# Altium PCB Regulator.PcbDoc
Units mm, origin at the board's own origin, x right, y up, seen from the top; angles counter-clockwise.
Board outline 50 x 100 mm, 2 copper layers (Top Layer, Bottom Layer); 16 components, 10 nets, 40 pads, 0 vias.
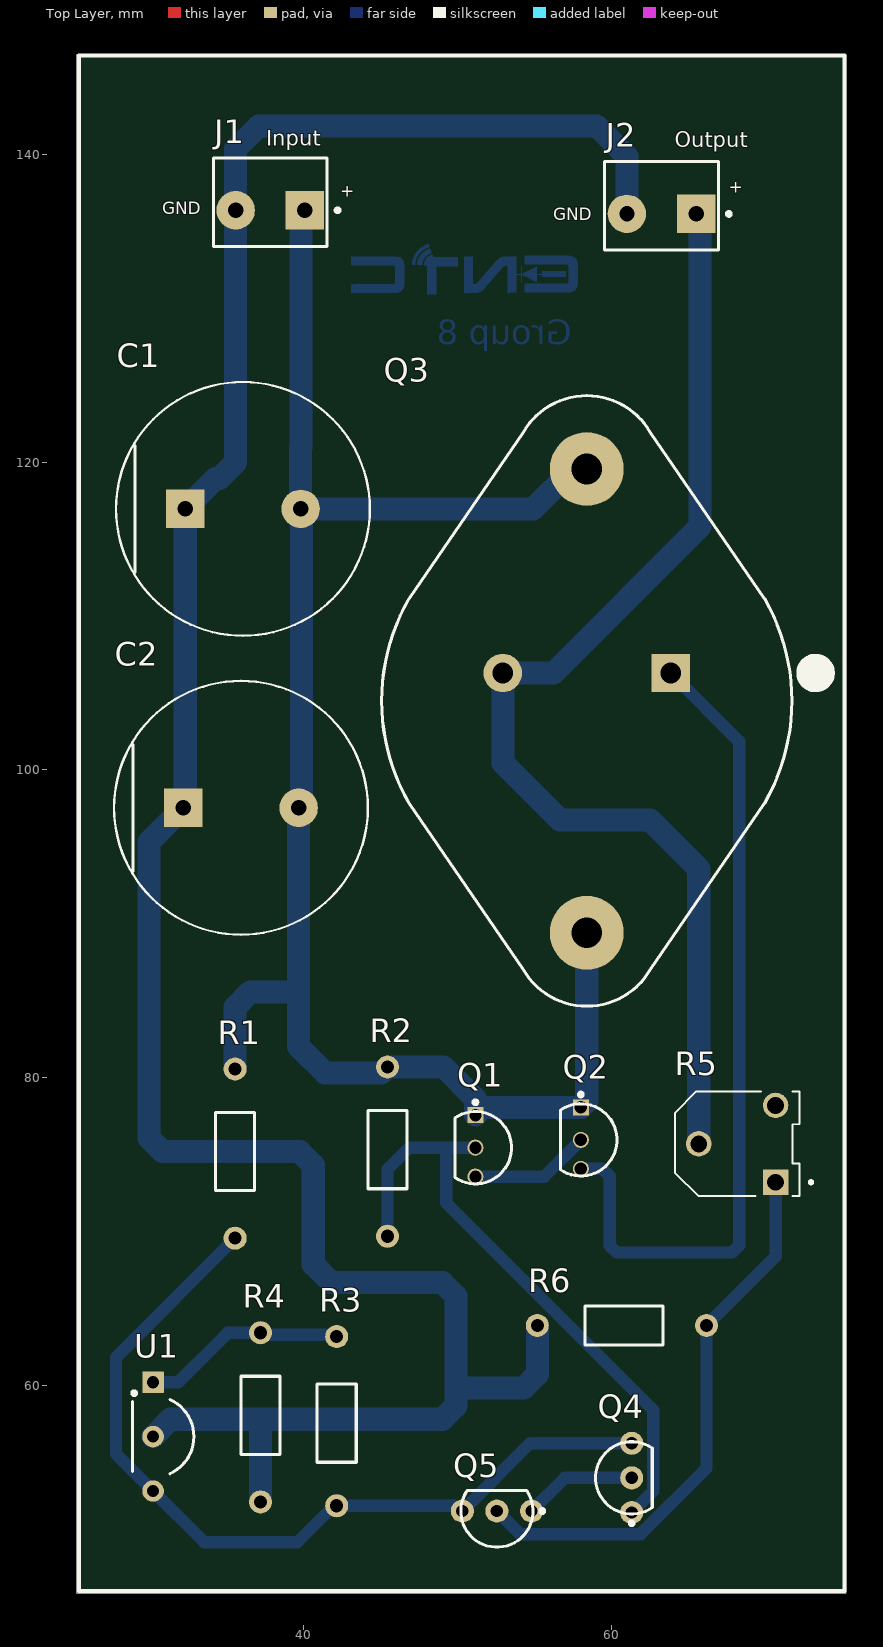
[diagram p0: Top Layer view]
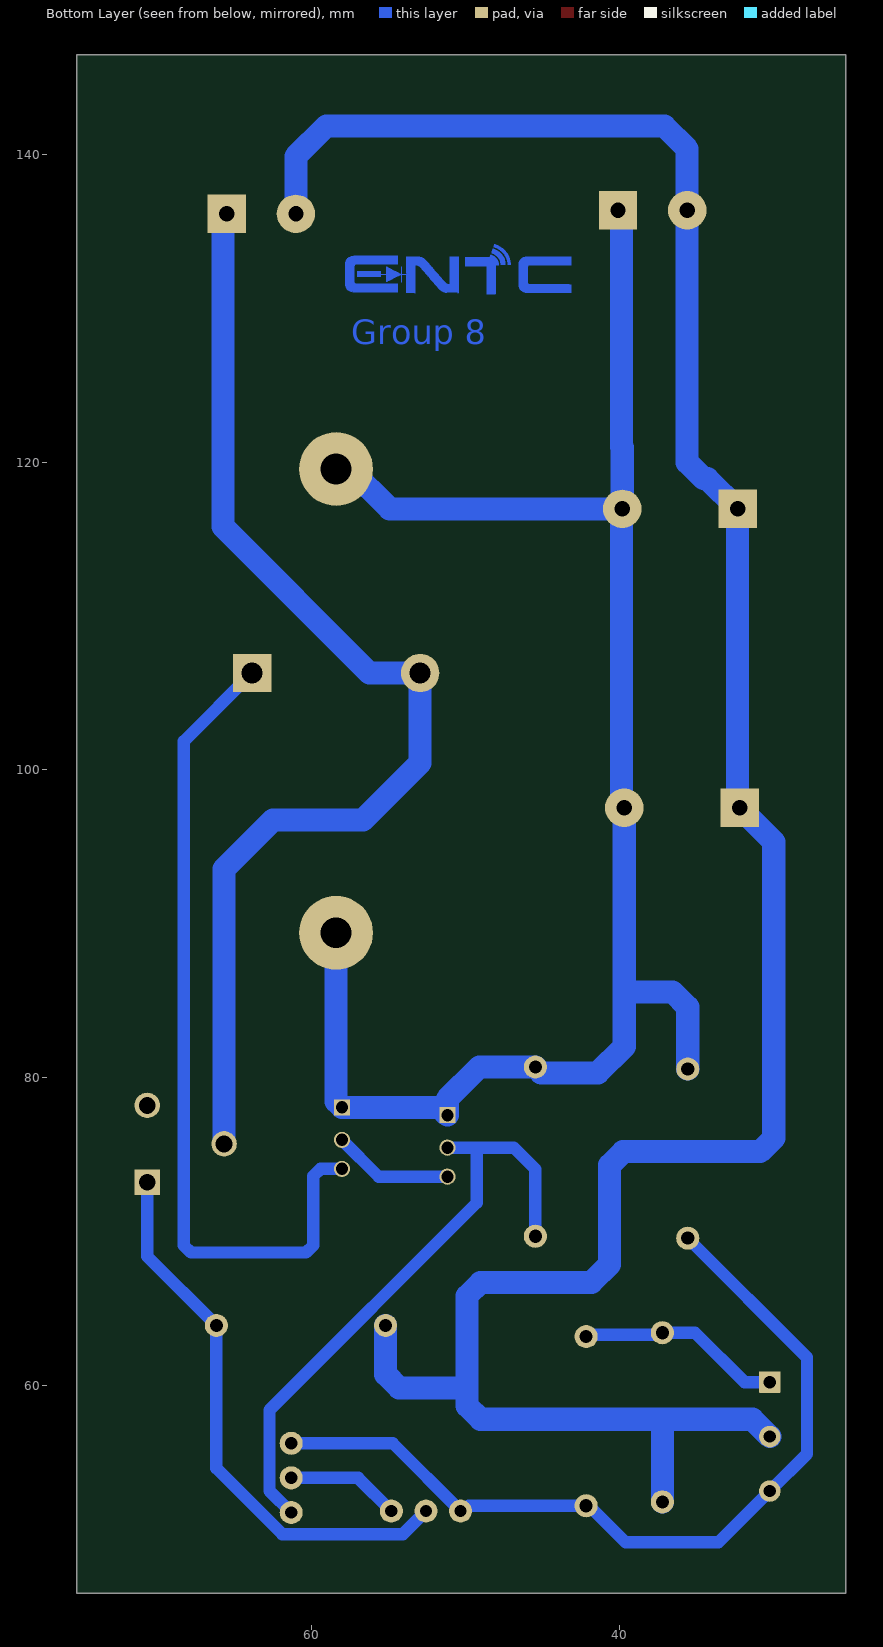
[diagram p1: Bottom Layer view, seen from below]

## Layer stack, top to bottom
Top Solder: solder mask 0.0102, Solder Resist, Dk 3.5
Top Layer: signal copper 0.0356
Dielectric 1: dielectric 0.32, FR-4, Dk 4.8
Bottom Layer: signal copper 0.0356
Bottom Solder: solder mask 0.0102, Solder Resist, Dk 3.5

## Board outline
25.273,46.482 25.273,146.482 75.273,146.482 75.273,46.482

## Design rules (kind name [scope] priority, off if disabled: settings)
Clearance Power_line_clearance [(InNet('GND') OR InNet('Power_line_Reg') OR InNet('Power_line_Un_reg'))] p1: gap=0.3 ignorepadtopadclearanceinfootprint=FALSE except(0: Arc-Hole Track-Hole SMDPad-Hole THPad-Hole Via-Hole Fill-Hole Poly-Hole Region-Hole Text-Hole)
Clearance [All] p2: gap=0.254 ignorepadtopadclearanceinfootprint=FALSE except(0: Arc-Hole Track-Hole SMDPad-Hole THPad-Hole Via-Hole Fill-Hole Poly-Hole Region-Hole Text-Hole)
PolygonConnect [All] p1: connectstyle=Relief reliefconductorwidth=0.254 reliefentries=4 polygonreliefangle="90 Angle" airgapwidth=0.254
RoutingVias [All] p1: holewidth=0.711 width=1.27 viastyle="Through Hole" minholewidth=0.711 minwidth=1.27 maxholewidth=0.711 maxwidth=1.27
SolderMaskExpansion [All] p1: expansion=0.102 istentingtop=FALSE
Width Power_net_widths [(InNet('GND') OR InNet('Power_line_Reg') OR InNet('Power_line_Un_reg'))] p1: maxlimit=3 minlimit=0.254 preferedwidth=1.5
Width [All] p2: maxlimit=1 minlimit=0.254 preferedwidth=0.8
30 further rules are at their usual default settings.

## Components (designator, comment, footprint, x,y, rotation, side; value= is the part's Value field where it differs from the comment)
C1 "10mF" FP-RAD-TH-D_16_0_5-L_25_2-MFG 36.068,116.967 r0 top
C2 "10mF" FP-RAD-TH-D_16_0_5-L_25_2-MFG 35.941,97.536 r0 top
J1 "In" FP-B2B-XH-A_LF_SN-MFG 37.846,136.906 r180 top
J2 "Out" FP-B2B-XH-A_LF_SN-MFG 63.282,136.669 r180 top
Q1 "P2N2222AG" ONSC-TO-92-3-29-11#1 51.181,75.438 r270 top
Q2 "P2N2222AG" ONSC-TO-92-3-29-11#1 58.039,75.946 r270 top
Q3 "2N3773G" ONSC-TO-204-3-1-07 58.421,104.484 r270 top
Q4 "2N5401" ONSC-TO-92-3-29-11#2 61.341,53.975 r90 top
Q5 "P2N2222AG" ONSC-TO-92-3-29-11#2 52.578,51.816 r180 top
R1 "1K" OMTE-WLA-2_V2 35.56,75.184 r90 top
R2 "330 ohm" OMTE-WLA-2_V2 45.466,75.311 r90 top
R3 "2.2K" OMTE-WLA-2_V2 42.164,57.531 r270 top
R4 "1K" OMTE-WLA-2_V2 37.211,58.039 r90 top
R5 "2K" TRIM_3306F-1-104 68.199,75.692 r0 top
R6 "5K" OMTE-WLA-2_V2 60.833,63.881 r0 top
U1 "TL431ILP" LP0003A 30.226,56.658 r0 top

## Footprints (in the part's own frame and the unit in brackets; to place one, negate y for a bottom-side part, rotate by r counter-clockwise, add the part's x,y. Pads: shape width x height; smd on the part's side, far side on the other; paste and mask are expansions set on the pad)
FP-B2B-XH-A_LF_SN-MFG [mm]
  rect 2.5x2.5 hole 1 paste-1000 mask+0: 1(-2.25,0.525)
  round 2.5 hole 1 paste-1000 mask+0: 2(2.25,0.525)
  silkscreen extent -4.5,-2.88 3.7,2.87, body extent -3.8,-2.98 3.8,2.98, height 0.25
FP-RAD-TH-D_16_0_5-L_25_2-MFG [mm]
  rect 2.5x2.5 hole 1 paste-1000 mask+0: 1(-3.75,0)
  round 2.5 hole 1 paste-1000 mask+0: 2(3.75,0)
  silkscreen extent -8.25,-8.25 8.25,8.25, body extent -8.35,-8.35 8.35,8.35, height 0.25
LP0003A [mm] "TO, Flat Index; 3 In-Line, Formed Axial Leads; Body Dia. 4.8mm; Leads 0.56 x 0.41 mm (max)"
  rrect7% 1.4x1.4 hole 0.8: 1(0,3.54)
  round 1.4 hole 0.8: 2(0,0) 3(0,-3.54)
  silkscreen extent -1.35,-2.41 2.65,2.95, body extent -1.33,-2.83 2.35,2.83, height 9.01
OMTE-WLA-2_V2 [mm] "2-Leads, Axial leaded, Body 2.54x5.08mm, Pin Spacing 7.62mm"
  round 1.5 hole 0.85: 1(-5.629,0) 2(5.371,0)
  silkscreen extent -2.54,-1.27 2.54,1.27, body extent -4.11,-1.26 4.11,1.27, height 2.54
ONSC-TO-92-3-29-11#1 [mm] "TO, 3-Leads, Body Dia 4.7mm, Pitch 1.27mm"
  rect 1.05x1.05 hole 0.8: 1(-2.116,0)
  round 1.05 hole 0.8: 2(0,0) 3(1.884,0)
  silkscreen extent -3.07,-1.34 2.35,2.35, body extent -2.35,-1.33 2.36,2.36, height 7.87
ONSC-TO-92-3-29-11#2 [mm] "TO, 3-Leads, Body Dia 4.7mm, Pitch 1.27mm"
  round 1.5 hole 0.8: 1(-2.254,0) 2(0,0) 3(2.246,0)
  silkscreen extent -3.07,-1.34 2.35,2.35, body extent -2.35,-1.33 2.36,2.36, height 7.87
ONSC-TO-204-3-1-07 [mm] "TO-204, Pin Spacing 10.92mm, Lead Dia. 1.09 mm (max)"
  rect 2.5x2.5 hole 1.35: 1(-1.815,5.46)
  round 2.5 hole 1.35: 2(-1.815,-5.46)
  round 4.8 hole 2 mask+0.102: 3(-15.075,0) 4(15.075,0)
  silkscreen extent -19.85,-13.33 19.85,15.5, body extent -19.84,-13.33 19.84,13.33, height 8.51
TRIM_3306F-1-104 [mm]
  rect 1.65x1.65 hole 1.1: 1(2.5,-2.5)
  round 1.65 hole 1.1: 2(-2.5,0) 3(2.5,2.5)
  silkscreen extent -4.05,-3.41 4.9,3.41, body extent -3.2,-1.6 3.2,1.6, height 0.75

## Part data
C1 C2: library part CMP-05427-001523-1, "Aluminum Electrolytic Capacitors (Radial Lead Type) AEC-Q200 Qualified 10000uF ±20% 10V", Case/Package=Radial, Max Operating Temperature=105°C, Min Operating Temperature=-55°C, Package Quantity=100, Ripple Current=1.89A, Tolerance=20%, Voltage=10V, Capacitance=10mF, Construction=RADIAL, Diameter=16mm, Height=25mm, Height - Seated (Max)=1.063inch, Lead Diameter=0.8mm, Lead Pitch=7.5mm, Lead/Base Style=Straight, Length=25mm, Life (Hours)=2000Hour, Mount="Through Hole", Packaging=Bulk, REACH SVHC="No SVHC", Ripple Current (AC)=1.89A, RoHS Compliant=Yes, Series=HD, Termination=Radial, Voltage Rating=10V, Voltage Rating (DC)=10V
J1 J2: library part CMP-2000-05888-3, "CONN HEADER VERT 2POS 2.5MM", Color=Natural, Contact Resistance=20mR, Current Rating=3A, Housing Color=White, Insulation Resistance=1GR, Max Operating Temperature=85°C, Max Voltage Rating (AC)=250V, Min Operating Temperature=-25°C, Connector Type="Male Pin", Contact Material=Brass, Contact Plating=Tin, Contact Type="Male Pin", Depth=5.75mm, Fastening Type=Detent, Housing Material=Polyamide, Lead Free="Lead Free", Lead Pitch=2.5mm, Length=7.4mm, Max Current Rating=3A, Max Voltage Rating (DC)=250V, Mount="Through Hole", Number of Contacts=2, Number of Positions=2, Number of Rows=1, Orientation=Straight, Packaging=Bulk, Pitch=2.5mm, REACH SVHC="No SVHC", Series=XH, Termination=Solder, Voltage Rating=250V, Voltage Rating (AC)=250V, Wire/Cable Gauge=22AWG
Q1 Q2 Q5: library part CMP-1048-01402-1, "Amplifier Transistor, NPN Silicon, 3-Pin TO-92, Pb-Free, Bulk Box", Manufacturer="On Semiconductor", ComponentLink1Description="Manufacturer URL", ComponentLink1URL=http://www.onsemi.com/, ComponentLink2Description=Datasheet, ComponentLink2URL=http://www.onsemi.com/pub_link/Collateral/P2N2222A-D.PDF, ComponentLink3Description="Package Specification", ComponentLink3URL=http://www.onsemi.cn/pub_link/Collateral/2N6426-D.PDF, DatasheetVersion="Rev. 7", fT Min (MHz)=300, IC Continuous (A)=0.6, Mounting Technology="Through Hole", PackageDescription="3-Pin Transistor Outline, Body 4.825 x 3.685 mm, Pitch 1.27 mm", PackageReference=TO-92-3-29-11_AM_SL, PackageVersion="Rev. AM", Packing="Bulk Box", PartNumber=P2N2222AG, Polarity=NPN, RoHS=TRUE
Q3: library part CMP-1048-01054-1, "NPN Power Transistor, 3-Pin TO-204, Pb-Free, Tray", Manufacturer="On Semiconductor", ComponentLink1Description="Manufacturer URL", ComponentLink1URL=http://www.onsemi.com/, ComponentLink2Description=Datasheet, ComponentLink2URL=http://www.onsemi.com/pub_link/Collateral/2N3773-D.PDF, ComponentLink3Description="Package Specification", ComponentLink3URL=http://www.onsemi.com/pub_link/Collateral/1-07.PDF, DatasheetVersion="Rev. 11", IC Continuous (A)=16, Mounting Technology="Through Hole", PackageDescription="2-Pin Transistor Outline, Body 39.37 x 26.67 mm, Pitch 10.92 mm", PackageReference=TO-204-3-1-07, PackageVersion="Rev. Z, 05/1988", Packing=Tray, PartNumber=2N3773G, Polarity=NPN, RoHS=TRUE
Q4: library part CMP-1048-01460-1, "Amplifier Transistor, PNP Silicon, 3-Pin TO-92, Bulk Box", Manufacturer="On Semiconductor", ComponentLink1Description="Manufacturer URL", ComponentLink1URL=http://www.onsemi.com/, ComponentLink2Description=Datasheet, ComponentLink2URL=http://www.onsemi.com/pub_link/Collateral/2N5401-D.PDF, ComponentLink3Description="Package Specification", ComponentLink3URL=http://www.onsemi.cn/pub_link/Collateral/2N6426-D.PDF, DatasheetVersion="Rev. 4", fT Min (MHz)=100, IC Continuous (A)=0.6, Mounting Technology="Through Hole", PackageDescription="3-Pin Transistor Outline, Body 4.825 x 3.685 mm, Pitch 1.27 mm", PackageReference=TO-92-3-29-11_AM_SL, PackageVersion="Rev. AM", Packing="Bulk Box", PartNumber=2N5401, Polarity=PNP, RoHS=FALSE
R1 R2 R3 R4 R6: library part CMP-1237-00001-1, "Miniature Wirewound Current Sense, 0.02 Ohm +/-1%, 0.5 W, 2-Pin THD, RoHS, 25pc Pack", Manufacturer=Ohmite, PartNumber=WLAR020FE, Power Rating="0.5 W", Rated Resistance="0.02 Ohm", Resistance Tolerance=+/-1%, ComponentLink1Description="Manufacturer URL", ComponentLink1URL=http://www.ohmite.com/, ComponentLink2Description=Datasheet, ComponentLink2URL=http://www.ohmite.com/cat/res_wl.pdf, ComponentLink3Description="Package Specification", ComponentLink3URL=http://www.ohmite.com/cat/res_wl.pdf, DatasheetVersion=May-14, Mounting Technology="Through Hole", PackageDescription="2-Pin Axial Lead, Body 5.08 x 2.54 mm, Lead Spread 25 mm", Packing="25pc Pack", RoHS=TRUE
R5: library part 3306F-1-104, "100 kOhms 0.2W, 1/5W PC Pins Through Hole Trimmer Potentiometer Cermet 1 Turn Top Adjustment", Package="6432 Bourns", Availability=Unavailable, Check_prices=https://www.snapeda.com/parts/3306F-1-104/Bourns/view-part/372285/?ref=eda, MF=Bourns, MP=3306F-1-104, Price=None, SnapEDA_Link=https://www.snapeda.com/parts/3306F-1-104/Bourns/view-part/372285/?ref=snap
U1: library part CMP-0366-00043-2, "Adjustable Precision Shunt Regulator, 34 ppm / degC, 100 mA, -40 to 85 degC, 3-pin TO-92 (LP), Pb-Free (RoHS)", Manufacturer="Texas Instruments", Rating=Military, Temp Coeff(Max)(ppm/ degree C)=92, Temp Coeff(Typ)(ppm/ degree C)=34, Code_JEDEC=TO-226, ComponentLink1Description="Manufacturer URL", ComponentLink1URL=http://www.ti.com/, ComponentLink2Description=Datasheet, ComponentLink2URL=http://www.ti.com/general/docs/lit/getliterature.tsp?genericPartNumber=TL431&fileType=pdf, ComponentLink3Description="Package Specification", ComponentLink3URL=http://www.ti.com/litv/pdf/msot002a, DatasheetVersion=SLVS543M, Eco-Plan="Pb-Free (RoHS)", Initial Accuracy @ 25/deg C(%)=2, Iout/Iz(Max)(mA)=100, Min Iz for Regulation(uA)=600, Mounting Technology="Through Hole", PackageDescription="Plastic Cylindrical Package, Formed Lead Option (TO-92)", PackageReference=LP0003A, PackageVersion=4040001-2/C, PartNumber=TL431ILP, SubFamily="Shunt Voltage Reference", VO Adj(Max)(V)=36, VO Adj(Min)(V)=2.495

## Nets (pads, with @x,y where several pads share a name; then routed paths per layer and width w, separated by ;. In a path a pad name is that pad's centre, name@x,y a point inside that pad or via, vN(x,y) a via of type N, cw(c..) or ccw(c..) an arc to the next point about the centre after c; other vN are vias at no path point)
GND: C1.1 C2.1 J1.2 J2.2 R4.1 R6.1 U1.2 | length 167.2
  Bottom Layer w1.5: U1.2 31.353,57.785 37.211,57.785 ; R4.1 37.211,57.785 ; R6.1 55.204,60.696 54.325,59.817 49.911,59.817 ; J2.2 61.032,139.882 59.055,141.859 37.084,141.859 35.596,140.371 35.596,119.991 34.535,118.93 34.281,118.93 C1.1 32.318,97.663 29.972,95.317 29.972,76.063 30.851,75.184 39.761,75.184 40.64,74.305 40.64,67.859 41.824,66.675 49.032,66.675 49.911,65.796 49.911,59.817 ; 37.211,57.785 49.032,57.785 49.911,58.664 49.911,59.817
NetQ1_2: Q1.2 Q4.1 R2.1 | length 40.5
  Bottom Layer w0.8: R2.1 45.466,74.041 46.863,75.438 49.276,75.438 ; Q1.2 49.276,75.438 ; Q4.1 62.745,53.125 62.745,58.391 49.276,71.86 49.276,75.438
NetQ1_3: Q1.3 Q2.2 | length 7.8
  Bottom Layer w0.8: Q1.3 55.647,73.554 Q2.2
NetQ2_3: Q2.3 Q3.1 | length 54.4
  Bottom Layer w0.8: Q2.3 59.436,74.062 59.905,73.593 59.905,69.09 60.373,68.621 67.857,68.621 68.326,69.09 68.326,101.854 Q3.1
NetQ4_2: Q4.2 Q5.1 | length 7.4
  Bottom Layer w0.8: Q5.1 56.991,53.975 Q4.2
NetQ5_2: Q5.2 R5.1 R6.2 | length 36.5
  Bottom Layer w0.8: Q5.2 54.077,50.317 61.923,50.317 66.204,54.598 R6.2 70.699,68.376 R5.1
NetR3_1: R3.1 R4.2 U1.1 | length 13.4
  Bottom Layer w0.8: U1.1 31.877,60.198 35.089,63.41 R4.2 37.336,63.285 42.039,63.285 R3.1
Power_line_Reg: J2.1 Q3.2 R5.2 | length 76.5
  Bottom Layer w1.5: J2.1 65.786,135.89 65.786,115.824 56.261,106.299 Q3.2 52.961,100.455 56.67,96.746 62.514,96.746 65.699,93.561 R5.2
Power_line_Un_reg: C1.2 C2.2 J1.1 Q1.1 Q2.1 Q3.3 Q3.4 R1.2 R2.2 | length 115.7
  Bottom Layer w1.5: R1.2 35.56,84.572 36.553,85.565 39.691,85.565 ; J1.1 39.855,136.14 39.855,121 39.818,120.963 C1.2 ; Q3.4 58.421,78.444 Q2.1 51.689,78.062 Q1.1 51.181,78.613 49.239,80.555 49.216,80.555 49.089,80.682 R2.2 45.085,80.301 41.402,80.301 39.691,82.012 39.691,85.565 ; Q3.3 57.528,119.559 54.936,116.967 C1.2 ; 39.691,85.565 C2.2 39.882,97.727 39.882,116.903 C1.2
Ref: Q4.3 Q5.3 R1.1 R3.2 U1.3 | length 56.1
  Bottom Layer w0.8: R1.1 27.813,61.808 27.813,55.531 U1.3 33.56,49.784 39.599,49.784 41.975,52.16 49.799,52.16 50.143,51.816 Q5.3 54.737,56.221 Q4.3
pads on no net: R5.3

## Other copper
Bottom Layer:
  region: 54.74,131.598 54.401,131.598 54.401,131.043 57.178,131.043 57.178,131.058 57.332,131.058 57.332,131.074 57.394,131.074 57.394,131.089 57.456,131.089 57.456,131.104 57.502,131.104 57.502,131.12 57.533,131.12 57.533,131.135 57.564,131.135 57.564,131.151 57.595,131.151 57.595,131.166 57.61,131.166 57.61,131.182 57.641,131.182 57.641,131.197 57.657,131.197 57.657,131.212 57.672,131.212 57.672,131.228 57.687,131.228 57.687,131.243 57.703,131.243 57.703,131.259 57.718,131.259 57.718,131.29 57.734,131.29 57.734,131.305 57.749,131.305 57.749,131.336 57.765,131.336 57.765,131.367 57.78,131.367 57.78,131.413 57.795,131.413 57.795,131.459 57.811,131.459 57.811,131.567 57.826,131.567 57.826,132.91 57.811,132.91 57.811,133.018 57.795,133.018 57.795,133.064 57.78,133.064 57.78,133.11 57.765,133.11 57.765,133.141 57.749,133.141 57.749,133.172 57.734,133.172 57.734,133.187 57.718,133.187 57.718,133.203 57.703,133.203 57.703,133.234 57.687,133.234 57.687,133.249 57.672,133.249 57.672,133.264 57.641,133.264 57.641,133.28 57.626,133.28 57.626,133.295 57.61,133.295 57.61,133.311 57.579,133.311 57.579,133.326 57.564,133.326 57.564,133.342 57.518,133.342 57.518,133.357 57.487,133.357 57.487,133.372 57.44,133.372 57.44,133.388 57.379,133.388 57.379,133.403 57.286,133.403 57.286,133.419 54.416,133.419 54.416,133.403 54.401,133.403 54.401,132.894 54.416,132.894 54.416,132.863 57.178,132.863 57.178,132.848 57.194,132.848 57.194,132.832 57.209,132.832 57.209,132.817 57.224,132.817 57.224,132.786 57.24,132.786 57.24,131.675 57.224,131.675 57.224,131.644 57.209,131.644 57.209,131.629 57.178,131.629 57.178,131.614 57.132,131.614 57.132,131.598 54.756,131.598
  region: 589 vertices and 0 holes, not listed, extent 50.451,130.996 57.039,133.372
  region: 45.684,131.567 43.261,131.567 43.261,131.552 43.122,131.552 43.122,131.012 46.023,131.012 46.023,131.027 46.116,131.027 46.116,131.043 46.177,131.043 46.177,131.058 46.224,131.058 46.224,131.074 46.254,131.074 46.254,131.089 46.285,131.089 46.285,131.104 46.316,131.104 46.316,131.12 46.332,131.12 46.332,131.135 46.362,131.135 46.362,131.151 46.378,131.151 46.378,131.166 46.393,131.166 46.393,131.182 46.409,131.182 46.409,131.197 46.424,131.197 46.424,131.212 46.44,131.212 46.44,131.243 46.455,131.243 46.455,131.259 46.47,131.259 46.47,131.29 46.486,131.29 46.486,131.32 46.501,131.32 46.501,131.351 46.517,131.351 46.517,131.398 46.532,131.398 46.532,131.49 46.548,131.49 46.548,132.894 46.532,132.894 46.532,132.987 46.517,132.987 46.517,133.033 46.501,133.033 46.501,133.064 46.486,133.064 46.486,133.095 46.47,133.095 46.47,133.126 46.455,133.126 46.455,133.156 46.44,133.156 46.44,133.172 46.424,133.172 46.424,133.187 46.409,133.187 46.409,133.203 46.393,133.203 46.393,133.218 46.378,133.218 46.378,133.234 46.362,133.234 46.362,133.249 46.332,133.249 46.332,133.264 46.316,133.264 46.316,133.28 46.285,133.28 46.285,133.295 46.254,133.295 46.254,133.311 46.208,133.311 46.208,133.326 46.177,133.326 46.177,133.342 46.116,133.342 46.116,133.357 46.023,133.357 46.023,133.372 43.122,133.372 43.122,132.832 43.138,132.832 43.138,132.817 45.915,132.817 45.915,132.802 45.93,132.802 45.93,132.786 45.946,132.786 45.946,132.755 45.961,132.755 45.961,131.629 45.946,131.629 45.946,131.598 45.93,131.598 45.93,131.583 45.9,131.583 45.9,131.567 45.699,131.567
  region: 157 vertices and 0 holes, not listed, extent 47.412,132.832 48.322,133.866
  region: 48.63,131.228 48.63,132.755 50.019,132.755 50.019,133.311 48.43,133.311 48.43,133.357 48.414,133.357 48.414,133.403 48.399,133.403 48.399,133.45 48.384,133.45 48.384,133.48 48.337,133.48 48.337,133.465 48.291,133.465 48.291,133.45 48.26,133.45 48.26,133.434 48.229,133.434 48.229,133.419 48.198,133.419 48.198,133.403 48.183,133.403 48.183,133.388 48.152,133.388 48.152,133.372 48.137,133.372 48.137,133.357 48.106,133.357 48.106,133.342 48.09,133.342 48.09,133.326 48.075,133.326 48.075,133.311 48.06,133.311 48.06,133.295 48.044,133.295 48.044,133.28 48.029,133.28 48.029,133.264 48.013,133.264 48.013,133.249 47.998,133.249 47.998,133.234 47.982,133.234 47.982,133.203 47.967,133.203 47.967,133.187 47.952,133.187 47.952,133.156 47.936,133.156 47.936,133.126 47.921,133.126 47.921,133.095 47.905,133.095 47.905,133.064 47.89,133.064 47.89,133.018 47.874,133.018 47.874,132.956 47.859,132.956 47.859,132.817 48.044,132.817 48.044,130.95 48.06,130.95 48.06,130.935 48.63,130.935 48.63,131.212
  region: 203 vertices and 0 holes, not listed, extent 47.072,132.832 48.183,134.159
  text "Group 8" at 57.451,127.678 h1.6

## Silkscreen, mask and mechanical layers (free items; w line width, h text height)
Top Overlay:
  lines w0.254: 25.4,46.609 75.184,46.609 75.184,146.431 25.4,146.431 25.4,46.609
  text "Input" at 37.592,140.589 h1
  text "Output" at 64.135,140.462 h1
  text "+" at 67.664,137.508 h0.8
  text "+" at 42.391,137.254 h0.8
  text "GND" at 30.834,136.117 h0.8
  text "GND" at 56.234,135.736 h0.8